# EAGLE board CT_schematic (EAGLE 7.6.0)

Size 100 x 80 mm. Coordinates in mm from the lower left corner, seen from the top.
Outline: 0,0 100,0 100,80 0,80 0,0
Copper layers (1*16): Top 0.035mm / dielectric 1.5mm / Bottom 0.035mm
Design rules "default": minimum track width 10mil, minimum drill 24mil, track to track 8mil, track to pad 8mil, pad to pad 8mil, via to via 8mil, smd to smd 8mil, copper to edge 40mil, drill to drill 8mil, minimum pad ring 10mil, minimum via ring 8mil, stop-mask expansion 4mil, vias tented up to drill 0mil, thermal gap 10mil

## Footprints (pad centres in the part's own frame; a part is rotated, then mirrored left to right if it is on the bottom)
C0603 = smd 0.8 x 0.8: 1 -0.762,0; 2 0.762,0
C0402 = smd 0.5 x 0.5: 1 -0.508,0; 2 0.508,0
C0805 = smd 1.2 x 1.3: 1 -1.016,0; 2 1.016,0
C1210 = smd 1.2 x 2.5: 1 -1.524,0; 2 1.524,0
C1206 = smd 1.3 x 1.6: 1 -1.524,0; 2 1.524,0
L0603 = smd 0.8 x 0.8: 1 -0.762,0; 2 0.762,0
DR1040 = smd 1.6 x 3.2: 1 -4.458,0; 2 4.458,0
R0603 = smd 0.8 x 0.8: 1 -0.762,0; 2 0.762,0
UFBGA64 = smd 0.2 x 0.2: A1 -1.75,1.75; A2 -1.25,1.75; A3 -0.75,1.75; A4 -0.25,1.75; A5 0.25,1.75; A6 0.75,1.75; A7 1.25,1.75; A8 1.75,1.75; B1 -1.75,1.25; B2 -1.25,1.25; B3 -0.75,1.25; B4 -0.25,1.25; B5 0.25,1.25; B6 0.75,1.25; B7 1.25,1.25; B8 1.75,1.25; C1 -1.75,0.75; C2 -1.25,0.75; C3 -0.75,0.75; C4 -0.25,0.75; C5 0.25,0.75; C6 0.75,0.75; C7 1.25,0.75; C8 1.75,0.75; D1 -1.75,0.25; D2 -1.25,0.25; D3 -0.75,0.25; D4 -0.25,0.25; D5 0.25,0.25; D6 0.75,0.25; D7 1.25,0.25; D8 1.75,0.25; E1 -1.75,-0.25; E2 -1.25,-0.25; E3 -0.75,-0.25; E4 -0.25,-0.25; E5 0.25,-0.25; E6 0.75,-0.25; E7 1.25,-0.25; E8 1.75,-0.25; F1 -1.75,-0.75; F2 -1.25,-0.75; F3 -0.75,-0.75; F4 -0.25,-0.75; F5 0.25,-0.75; F6 0.75,-0.75; F7 1.25,-0.75; F8 1.75,-0.75; G1 -1.75,-1.25; G2 -1.25,-1.25; G3 -0.75,-1.25; G4 -0.25,-1.25; G5 0.25,-1.25; G6 0.75,-1.25; G7 1.25,-1.25; G8 1.75,-1.25; H1 -1.75,-1.75; H2 -1.25,-1.75; H3 -0.75,-1.75; H4 -0.25,-1.75; H5 0.25,-1.75; H6 0.75,-1.75; H7 1.25,-1.75; H8 1.75,-1.75
RFM75-S = smd 0.85 x 1.6: 1 1.7,0.8; 2 2.97,0.8; 3 4.24,0.8; 4 5.51,0.8; 5 6.78,0.8; 6 8.05,0.8; 7 9.32,0.8; 8 10.59,0.8
QFN-32 = smd 0.6 x 0.3: 1 -2.3,1.75; 2 -2.3,1.25; 3 -2.3,0.75; 4 -2.3,0.25; 5 -2.3,-0.25; 6 -2.3,-0.75; 7 -2.3,-1.25; 8 -2.3,-1.75; 17 2.3,-1.75; 18 2.3,-1.25; 19 2.3,-0.75; 20 2.3,-0.25; 21 2.3,0.25; 22 2.3,0.75; 23 2.3,1.25; 24 2.3,1.75 | smd 0.3 x 0.6: 9 -1.75,-2.3; 10 -1.25,-2.3; 11 -0.75,-2.3; 12 -0.25,-2.3; 13 0.25,-2.3; 14 0.75,-2.3; 15 1.25,-2.3; 16 1.75,-2.3; 25 1.75,2.3; 26 1.25,2.3; 27 0.75,2.3; 28 0.25,2.3; 29 -0.25,2.3; 30 -0.75,2.3; 31 -1.25,2.3; 32 -1.75,2.3 | smd 3.2 x 3.2: EXP 0,0
SJ-43515TS-SMT-TR = smd 2.2 x 3: 1 0.6,-7.4; 4 3.4,-7.4 | smd 3 x 3: 2 12.8,-7.4; 5 17,-3 | smd 2 x 3: 3 5.3,0; 6 2.5,0 | drill 1.8: P$7 4.5,-3.69; P$8 11.54,-3.69
WM-64PC = drill 0.6 pad 1: 1 -1,0.95; 2 -1,-0.95
ABS07-32.768KHZ-7-T = smd 1.1 x 2.4: 1 -2.5,0; 2 0,0
ABLS-25.000MHZ-B2F-T = smd 5.6 x 2.8: 1 -3.81,0; 2 5.69,0
ASFL1 = smd 1.7 x 1.5: 1 -1.27,-1.1; 2 1.27,-1.1; 3 1.27,1.1; 4 -1.27,1.1
TSOT-23-5 = smd 1.3 x 0.62: 1 -1.31,0.95; 2 -1.31,0; 3 -1.31,-0.95; 4 1.31,-0.95; 5 1.31,0.95
SOIC-8_EP = smd 1.6 x 0.533: 1 -2.921,1.905; 2 -2.921,0.635; 3 -2.921,-0.635; 4 -2.921,-1.905; 5 2.921,-1.905; 6 2.921,-0.635; 7 2.921,0.635; 8 2.921,1.905 | smd 2.54 x 3.302: EPAD 0,0 | drill 0.406 pad 0.406: P$1 -0.508,0.635; P$2 0.381,0.635; P$3 -0.508,-0.635; P$4 0.381,-0.635
DFN8_2X3MC = smd 0.813 x 0.305: 1 -1.398,0.75; 2 -1.398,0.25; 3 -1.398,-0.25; 4 -1.398,-0.75; 5 1.398,-0.75; 6 1.398,-0.25; 7 1.398,0.25; 8 1.398,0.75 | smd 1.753 x 1.549: 9 0,0
JST-2-SMD = smd 1 x 4.6: 1 -1,-3.7; 2 1,-3.7 | smd 1.6 x 3.4: NC1 -3.4,1.5; NC2 3.4,1.5
FCI_10118193-0001LF = smd 0.4 x 1.35: 1 -1.3,2.675; 2 -0.65,2.675; 3 0,2.675; 4 0.65,2.675; 5 1.3,2.675 | smd 1.6 x 1.4: 6 -3.2,2.45; 7 3.2,2.45 | smd 1.9 x 1.9: 8 -1.2,0; 9 1.2,0 | hole 0.5: -3.3,0; 3.3,0
SON-6 = smd 0.55 x 0.3: 1 -0.355,0.5 | smd 0.52 x 0.3: 2 -0.37,0; 3 -0.37,-0.5; 4 0.37,-0.5; 5 0.37,0; 6 0.37,0.5
RUT0012A = smd 0.7 x 0.2: 1 -0.7,0.8; 2 -0.7,0.4; 3 -0.7,0; 4 -0.7,-0.4; 5 -0.7,-0.8; 7 0.7,-0.8; 8 0.7,-0.4; 9 0.7,0; 10 0.7,0.4; 11 0.7,0.8 | smd 0.2 x 0.7: 6 0,-0.85; 12 0,0.85
SW_4-1437565-2 = smd 1.4 x 2.1: 1 -2.23,4.55; 2 -2.23,-4.55; 3 2.23,4.55; 4 2.23,-4.55
LGM67K-G1J2-24-Z = smd 0.8 x 1.4: A -2,0; C 0,0
NC7SZ125M5X = smd 1.3 x 0.7: 1 -1.3,0.95; 2 -1.3,0; 3 -1.3,-0.95; 4 1.3,-0.95; 5 1.3,0.95

## Placement (x,y rotation side)
C1  1e-06  [C0603]  -78.74,77.47 0 top  (outside the outline)
C2  1e-07  [C0603]  -15.24,82.55 0 top  (outside the outline)
C3  1e-07  [C0603]  -19.05,82.55 0 top  (outside the outline)
C4  1e-07  [C0603]  -22.86,82.55 0 top  (outside the outline)
C5  4.7e-06  [C0603]  -74.93,77.47 0 top  (outside the outline)
C6  1e-07  [C0603]  -26.67,82.55 0 top  (outside the outline)
C7  1e-07  [C0603]  -30.48,82.55 0 top  (outside the outline)
C8  1e-08  [C0603]  -34.29,82.55 0 top  (outside the outline)
C9  1e-06  [C0603]  -38.1,82.55 0 top  (outside the outline)
C10  1e-11  [C0402]  -34.29,87.63 0 top  (outside the outline)
C11  1e-11  [C0402]  -38.1,87.63 0 top  (outside the outline)
C12  1e-11  [C0402]  -41.91,87.63 0 top  (outside the outline)
C13  1e-11  [C0402]  -45.72,87.63 0 top  (outside the outline)
C14  1e-07  [C0402]  -49.53,87.63 0 top  (outside the outline)
C15  1e-06  [C0603]  -41.91,82.55 0 top  (outside the outline)
C16  1e-06  [C0603]  -45.72,82.55 0 top  (outside the outline)
C17  1e-06  [C0603]  -49.53,82.55 0 top  (outside the outline)
C18  1e-06  [C0603]  -53.34,82.55 0 top  (outside the outline)
C19  1e-06  [C0603]  -57.15,82.55 0 top  (outside the outline)
C20  1e-06  [C0603]  -60.96,82.55 0 top  (outside the outline)
C21  1e-06  [C0603]  -64.77,82.55 0 top  (outside the outline)
C22  1e-06  [C0603]  -68.58,82.55 0 top  (outside the outline)
C23  1e-07  [C0402]  -53.34,87.63 0 top  (outside the outline)
C24  1e-07  [C0402]  -57.15,87.63 0 top  (outside the outline)
C25  1e-07  [C0402]  -60.96,87.63 0 top  (outside the outline)
C26  1e-07  [C0402]  -64.77,87.63 0 top  (outside the outline)
C27  1e-06  [C0603]  -72.39,82.55 0 top  (outside the outline)
C28  1e-08  [C0402]  -68.58,87.63 0 top  (outside the outline)
C29  1e-05  [C0805]  -53.34,71.12 0 top  (outside the outline)
C30  1e-05  [C0805]  -58.42,71.12 0 top  (outside the outline)
C31  1e-05  [C1210]  -78.74,64.77 0 top  (outside the outline)
C32  1e-05  [C1210]  -16.51,72.39 0 top  (outside the outline)
C33  1e-05  [C1210]  -22.86,72.39 0 top  (outside the outline)
C34  1e-05  [C1210]  -29.21,72.39 0 top  (outside the outline)
C35  1e-07  [C0402]  -72.39,87.63 0 top  (outside the outline)
C36  1e-05  [C1206]  -35.56,72.39 0 top  (outside the outline)
C37  1e-05  [C1206]  -41.91,72.39 0 top  (outside the outline)
C38  1e-08  [C0402]  -76.2,87.63 0 top  (outside the outline)
C39  1e-07  [C0402]  -80.01,87.63 0 top  (outside the outline)
C40  1e-08  [C0402]  -15.24,92.71 0 top  (outside the outline)
C41  1e-07  [C0402]  -19.05,92.71 0 top  (outside the outline)
C42  1e-08  [C0402]  -22.86,92.71 0 top  (outside the outline)
F1  240.0  [L0603]  -76.2,82.55 0 top  (outside the outline)
I1  3.8e-06  [DR1040]  -38.1,43.18 0 top  (outside the outline)
R2  1000.0  [R0603]  -80.01,82.55 0 top  (outside the outline)
R4  4700.0  [R0603]  -15.24,87.63 0 top  (outside the outline)
R5  10000.0  [R0603]  -35.56,77.47 0 top  (outside the outline)
R6  10000.0  [R0603]  -40.64,77.47 0 top  (outside the outline)
R7  10000.0  [R0603]  -45.72,77.47 0 top  (outside the outline)
R8  10000.0  [R0603]  -50.8,77.47 0 top  (outside the outline)
R9  1270.0  [R0603]  -19.05,87.63 0 top  (outside the outline)
R10  1270.0  [R0603]  -22.86,87.63 0 top  (outside the outline)
R11  490000.0  [R0603]  -15.24,77.47 0 top  (outside the outline)
R12  1000000.0  [R0603]  -78.74,71.12 0 top  (outside the outline)
R13  4031.5447154472  [R0603]  -73.66,71.12 0 top  (outside the outline)
R14  2200.0  [R0603]  -26.67,87.63 0 top  (outside the outline)
R15  10000.0  [R0603]  -55.88,77.47 0 top  (outside the outline)
R16  10000.0  [R0603]  -60.96,77.47 0 top  (outside the outline)
R17  82000.0  [R0603]  -66.04,77.47 0 top  (outside the outline)
R18  300000.0  [R0603]  -20.32,77.47 0 top  (outside the outline)
R19  120000.0  [R0603]  -25.4,77.47 0 top  (outside the outline)
R20  2000.0  [R0603]  -30.48,87.63 0 top  (outside the outline)
R21  10000.0  [R0603]  -71.12,77.47 0 top  (outside the outline)
R22  200000.0  [R0603]  -30.48,77.47 0 top  (outside the outline)
U1  stm32f058r8h7  [UFBGA64]  -38.1,55.88 0 top  (outside the outline)
U2  RFM75-S  [RFM75-S]  -26.67,3.81 0 top  (outside the outline)
U3  SGTL5000XNAA3  [QFN-32]  -22.86,55.88 0 top  (outside the outline)
U4  SJ-43515TS-SMT-TR  [SJ-43515TS-SMT-TR]  -54.61,10.16 0 top  (outside the outline)
U5  SJ-43515TS-SMT-TR  [SJ-43515TS-SMT-TR]  -39.37,33.02 0 top  (outside the outline)
U6  SJ-43515TS-SMT-TR  [SJ-43515TS-SMT-TR]  -67.31,33.02 0 top  (outside the outline)
U7  WM-64PCT  [WM-64PC]  -66.04,43.18 0 top  (outside the outline)
U8  ABS07-32.768KHZ-7-T  [ABS07-32.768KHZ-7-T]  -49.53,64.77 0 top  (outside the outline)
U9  ABLS-25.000MHZ-B2F-T  [ABLS-25.000MHZ-B2F-T]  -26.67,64.77 0 top  (outside the outline)
U10  ASFL-24.57MHZ-NCS  [ASFL1]  -57.15,54.61 0 top  (outside the outline)
U11  ltc3406es5  [TSOT-23-5]  -63.5,71.12 0 top  (outside the outline)
U12  MIC5234YME  [SOIC-8_EP]  -58.42,64.77 0 top  (outside the outline)
U13  MCP73831T-2ACI/MC  [DFN8_2X3MC]  -48.26,91.44 0 top  (outside the outline)
U14  S2B-PH-SM4-TB(LF)(SN)  [JST-2-SMD]  -53.34,44.45 0 top  (outside the outline)
U15  10118193-0001LF  [FCI_10118193-0001LF]  -66.04,54.61 0 top  (outside the outline)
U16  TPS3895ADRYR  [SON-6]  -41.91,91.44 0 top  (outside the outline)
U17  LSF0204DRUTR  [RUT0012A]  -36.83,92.71 0 top  (outside the outline)
U18  4-1437565-2  [SW_4-1437565-2]  -27.94,44.45 0 top  (outside the outline)
U19  Q65110A2395  [LGM67K-G1J2-24-Z]  -67.31,64.77 0 top  (outside the outline)
U20  nc7sz125m5x  [NC7SZ125M5X]  -46.99,71.12 0 top  (outside the outline)

## Library data of the parts
C1-C42 F1 I1 R2 R4-R22 U1-U20 = circuit_tree

## Nets
CLK_CRYSTAL_U1_A1: C10.1 U1.A1 U8.1
CLK_CRYSTAL_U1_B1: C11.1 U1.B1 U8.2
CLK_CRYSTAL_U1_C1: C12.1 U1.C1 U9.1
CLK_CRYSTAL_U1_D1: C13.1 U1.D1 U9.2
CLK_U3_21: U3.21 U10.3
GND: C1.2 C2.2 C3.2 C4.2 C5.2 C6.2 C7.2 C8.2 C9.2 C10.2 C11.2 C12.2 C13.2 C14.2 C15.2 C23.2 C24.2 C25.2 C26.2 C27.2 C28.2 C29.2 C30.1 C30.2 C31.2 C32.2 C33.2 C34.2 C35.2 C36.2 C37.2 C38.2 C39.2 C40.2 C41.2 C42.2 R2.2 R5.2 R6.2 R10.2 R11.2 R14.2 R17.2 R19.2 R20.2 U1.D4 U1.D5 U1.F1 U2.1 U3.1 U3.3 U3.7 U3.EXP U5.1 U6.1 U7.2 U10.2 U11.2 U12.7 U12.EPAD U13.6 U13.9 U14.2 U15.5 U15.6 U15.7 U15.8 U15.9 U16.2 U17.6 U19.C U20.1 U20.3
INPUT_USBPOWER_5V: C36.1 R21.2 U13.1 U13.2 U15.1
NET_U1_B4: R5.1 U1.B4
NET_U1_E1: R4.1 U1.E1 U20.4
NET_U1_G6: R6.1 U1.G6
NET_U1_H1: C8.1 C9.1 F1.1 U1.H1
NET_U1_H7: U19.A
NET_U1_H8: U18.3 U18.4
NET_U2_3: R7.1 U2.3
NET_U3_10: C26.1 U3.10
NET_U3_29: R9.1 U3.29
NET_U3_31: R10.1 U3.31
NET_U4_1: U3.4 U4.1
NET_U4_2: U3.2 U4.2
NET_U4_5: U3.6 U4.5
NET_U5_2: C17.1 U5.2
NET_U5_5: C16.1 U5.5
NET_U5_11: C17.2
NET_U5_12: C16.2
NET_U6_2: C19.1 C20.1 U6.2
NET_U6_5: C18.1 U6.5
NET_U6_13: C19.2 C20.2
NET_U6_14: C18.2
NET_U7_1: C21.1 C22.1 C27.1 U3.16 U7.1
NET_U7_15: C21.2 C22.2
NET_U11_1: U11.1
NET_U11_3: I1.1 U11.3
NET_U11_5: R11.1 R12.1 U11.5
NET_U11_ATNET_3: I1.2 R12.2
NET_U12_4: R13.2 R14.1 U12.4
NET_U13_5: R21.1 U13.5
NET_U13_8: R20.1 U13.8
NET_U16_1: R16.1 R17.1 U16.1
NET_U16_3: R18.2 R19.1 U16.3
NET_U16_4: R15.1 U16.4 U20.2
NET_U17_12: R22.1 U17.12
NET_U18_1: R2.1 U18.1 U18.2
PROC_I2S1_CK: U1.A5 U3.24
PROC_I2S1_SD: U1.C4 U3.26
PROC_I2S1_WS: U1.A6 U3.23
PROC_SPI1_MISO_TOIOBUF: U17.3
PROC_SPI1_MISO_TOXCVR: U2.7 U17.9
PROC_SPI1_MOSI_TOIOBUF: U17.2
PROC_SPI1_MOSI_TOXCVR: U2.6 U17.10
PROC_SPI1_NSS_TOIOBUF: U17.5
PROC_SPI1_NSS_TOXCVR: R8.1 U2.4 U17.7
PROC_SPI1_SCK_TOIOBUF: U17.4
PROC_SPI1_SCK_TOXCVR: U2.5 U17.8
VCC_S1_3V7: C29.1 C31.1 C32.1 C37.1 U11.4 U12.5 U12.8 U13.3 U13.4 U14.1
VCC_TIER1_1V8: C1.1 C2.1 C3.1 C4.1 C5.1 C6.1 C7.1 C23.1 C24.1 C25.1 C30.2 C35.1 C40.1 C41.1 C42.1 F1.2 I1.2 R4.2 R9.2 R12.2 R15.2 R16.2 R18.1 R22.2 U1.B2 U1.E4 U1.E5 U3.5 U3.20 U3.30 U16.6 U17.1 U20.5
VCC_TIER1_3V3: C14.1 C15.1 C28.1 C33.1 C34.1 C38.1 C39.1 R7.2 R8.2 R13.1 U2.2 U10.4 U12.1 U17.11

## Tracks (layer width: path | path; a pad name or v marks a point on that pad's centre or on a via)
CLK_CRYSTAL_U1_A1  (2 unrouted)
CLK_CRYSTAL_U1_B1  (2 unrouted)
CLK_CRYSTAL_U1_C1  (2 unrouted)
CLK_CRYSTAL_U1_D1  (2 unrouted)
CLK_U3_21  (1 unrouted)
GND  (72 unrouted)
INPUT_USBPOWER_5V  (4 unrouted)
NET_U1_B4  (1 unrouted)
NET_U1_E1  (2 unrouted)
NET_U1_G6  (1 unrouted)
NET_U1_H1  (3 unrouted)
NET_U1_H8  (1 unrouted)
NET_U2_3  (1 unrouted)
NET_U3_10  (1 unrouted)
NET_U3_29  (1 unrouted)
NET_U3_31  (1 unrouted)
NET_U4_1  (1 unrouted)
NET_U4_2  (1 unrouted)
NET_U4_5  (1 unrouted)
NET_U5_2  (1 unrouted)
NET_U5_5  (1 unrouted)
NET_U6_2  (2 unrouted)
NET_U6_5  (1 unrouted)
NET_U6_13  (1 unrouted)
NET_U7_1  (4 unrouted)
NET_U7_15  (1 unrouted)
NET_U11_3  (1 unrouted)
NET_U11_5  (2 unrouted)
NET_U11_ATNET_3  (1 unrouted)
NET_U12_4  (2 unrouted)
NET_U13_5  (1 unrouted)
NET_U13_8  (1 unrouted)
NET_U16_1  (2 unrouted)
NET_U16_3  (2 unrouted)
NET_U16_4  (2 unrouted)
NET_U17_12  (1 unrouted)
NET_U18_1  (2 unrouted)
PROC_I2S1_CK  (1 unrouted)
PROC_I2S1_SD  (1 unrouted)
PROC_I2S1_WS  (1 unrouted)
PROC_SPI1_MISO_TOXCVR  (1 unrouted)
PROC_SPI1_MOSI_TOXCVR  (1 unrouted)
PROC_SPI1_NSS_TOXCVR  (2 unrouted)
PROC_SPI1_SCK_TOXCVR  (1 unrouted)
VCC_S1_3V7  (9 unrouted)
VCC_TIER1_1V8  (32 unrouted)
VCC_TIER1_3V3  (13 unrouted)